# Altium PCB USB-IRIS-W1.PcbDoc (part 3 of 3)
Units mm, origin at the board's own origin, x right, y up, seen from the top; angles counter-clockwise.
Board outline 87.91 x 18 mm, 4 copper layers (Top Layer, Layer 2, Layer 3, Bottom Layer), stack 2.472 mm thick; 87 components, 85 nets, 417 pads, 400 vias.
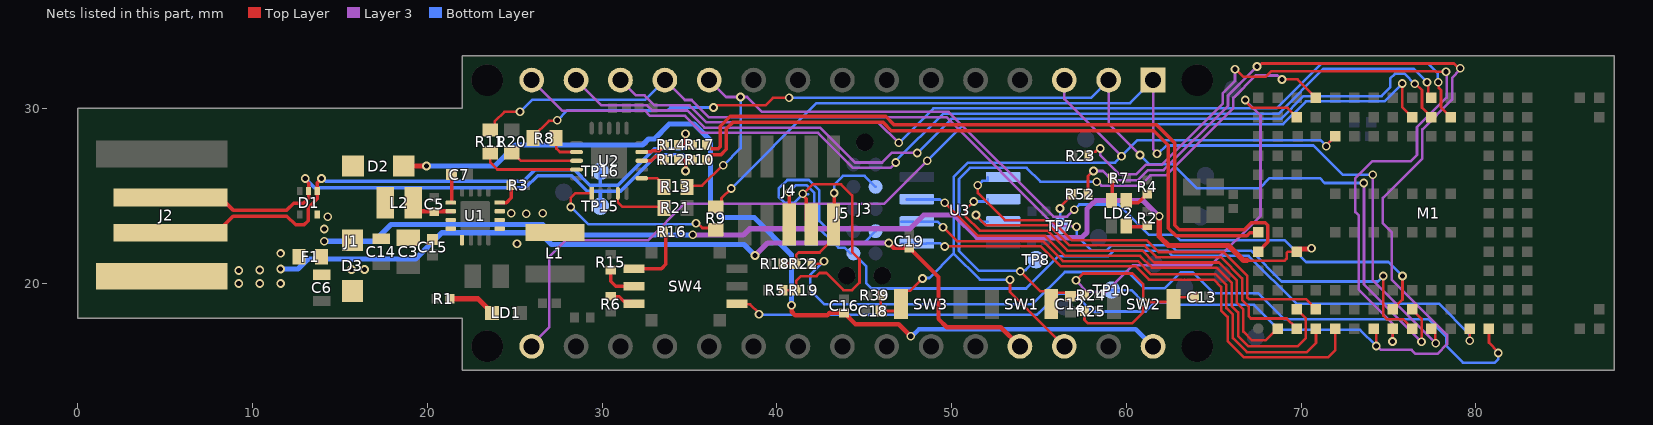
[diagram p4: the nets of this part, all layers, seen from the top]

## Via types
v1: diameter 0.5, hole 0.3, Top Layer to Bottom Layer, tented both sides, 234 vias
v2: diameter 0.5/0.5/0.5/0.5 (per signal layer), hole 0.3, Top Layer to Bottom Layer, tented both sides, 166 vias

## Nets (pads, with @x,y where several pads share a name; then routed paths per layer and width w, separated by ;. In a path a pad name is that pad's centre, name@x,y a point inside that pad or via, vN(x,y) a via of type N, cw(c..) or ccw(c..) an arc to the next point about the centre after c; other vN are vias at no path point) (continued)
JTAG-TDO: J3.6 J4.6 M1.A12 | length 49
  Top Layer w0.15: M1.A12@79.65,17.4 79.654,17.396 v1(79.654,16.701)
  Top Layer w0.2: J4.6@40.7,23.35 v1(40.7,25.2)
  Bottom Layer w0.15: v1(40.7,25.2) 41.1,25.6 41.7,25.6 42.129,25.171 42.129,23.42 43.524,22.025 43.879,22.025 44.204,21.7 J3.6@44.38,21.7 45.118,20.962 45.118,19.982 45.409,19.691 54.265,19.691 56.118,21.544 58.967,21.544 59.278,21.856 62.345,21.856 62.646,21.555 66.996,21.555 69.729,18.821 77.879,18.821 79.641,17.059 79.641,16.714 v1(79.654,16.701)
JTAG-TMS: M1.A14 R22.1 | length 48.7
  Top Layer w0.15: R22.1@42,20.9 42,20.95 R22.1@42.075,21.025 ; R22.1@42,21.1 42.455,21.1 42.605,21.25 v2(42.7,21.25) ; M1.A14@80.75,17.4 80.75,16.594 81.28,16.064 v1(81.28,16.002)
  Bottom Layer w0.15: v2(42.7,21.25) 41.9,20.45 41.9,19.599 42.708,18.791 54.638,18.791 56.482,20.635 60.093,20.635 61.028,19.7 62.187,19.7 63.115,20.629 63.786,20.629 64.988,19.426 67.536,19.426 69.041,17.921 77.33,17.921 78.3,16.951 78.3,16.417 79.266,15.451 81.084,15.451 81.272,15.638 81.272,15.994 v1(81.28,16.002)
NetJ1_2: J1.2 M1.E3 | length 60.5
  Top Layer w0.15: 66.9,21.3 66.925,21.275 69.043,21.275 69.175,21.407 69.175,21.712 69.263,21.8 M1.E3@69.75,21.8
  Top Layer w0.3: v1(61.882,23.831) 61.882,22.674 62.402,22.155 65.845,22.155 66.7,21.3 66.9,21.3 ; M1.E3@69.75,21.8 69.9,21.95 70.496,21.95 70.546,22 v1(70.6,22)
  Layer 3 w0.3: v2(35.179,22.765) 35.185,22.758 38.083,22.758 38.429,23.104 47.604,23.104 48.4,23.9 50.166,23.9 51.466,22.6 57.45,22.6 57.75,22.9 57.75,24.25 58.225,24.725 60.955,24.725 61.849,23.831 v1(61.882,23.831)
  Bottom Layer w0.3: J1.2@16.002,22.4 16.975,22.4 17.925,23.35 26.6,23.35 27.192,22.758 35.173,22.758 v2(35.179,22.765)
NetLD1_1: LD1.1 R1.1 | length 2.7
  Top Layer w0.3: R1.1@21.3,19.1 22.9,19.1 23.45,18.55 LD1.1@23.7,18.3
NetLD2_1: LD2.1 R7.1 | length 1.3
  Top Layer w0.2: LD2.1@59.15,24.725 59.2,24.775 R7.1@59.2,26
NetLD2_2: LD2.2 R4.1 | length 1.5
  Top Layer w0.2: LD2.2@60,24.725 60.125,24.6 60.675,24.6 61.015,24.94 61.04,24.94 R4.1@61.2,25.1
NetLD2_3: LD2.3 R2.1 | length 1.2
  Top Layer w0.2: LD2.3@60,23.225 61.125,23.225 R2.1@61.2,23.3
NetR6_1: R6.1 SW4.6 | length 1.5
  Top Layer w0.2: R6.1@30.5,19.25 30.533,19.217 30.983,19.217 31.232,18.968 31.676,18.968 SW4.6@31.826,18.818
NetR8_1: R8.1 U2.17 | length 1.8
  Top Layer w0.15: R8.1@27.35,28.3 27.382,28.268 27.382,27.7 27.582,27.5 U2.17@28.534,27.5
NetR9_1: R9.1 U2.1 | length 10.8
  Top Layer w0.15: v2(28.202,24.349) 28.202,24.875 28.473,25.146 29.388,25.146 U2.1@29.4,25.135 ; v2(35.366,23.424) 35.461,23.424 35.735,23.15 R9.1@36.6,23.15
  Bottom Layer w0.15: v2(28.202,24.349) 28.226,24.349 29.2,23.375 35.318,23.375 v2(35.366,23.424)
NetR11_1: R11.1 U2.19 | length 5.7
  Top Layer w0.15: R11.1@23.6,27.45 23.6,26.9 24,26.5 27.932,26.5 U2.19@28.534,26.5
NetR13_1: R13.1 U2.6 | length 1.5
  Top Layer w0.15: U2.6@32.265,26 33.125,26 33.55,25.575 R13.1@33.55,25.5
NetR15_1: R15.1 SW4.5 | length 2.1
  Top Layer w0.2: R15.1@30.5,20.75 30.5,20.1 30.782,19.818 SW4.5@31.826,19.818
NetR16_1: R16.1 SW4.4 | length 3.9
  Top Layer w0.2: SW4.4@31.826,20.818 33.393,20.818 33.65,21.075 33.65,22.825 R16.1@33.525,22.95
NetR20_1: R20.1 U2.18 | length 3.9
  Top Layer w0.15: R20.1@24.834,27.45 24.909,27.45 25.359,27 U2.18@28.534,27
NetR21_1: R21.1 U2.4 | length 3.3
  Top Layer w0.15: U2.4@30.9,25.135 30.9,24.625 31.15,24.375 33.42,24.375 R21.1@33.513,24.282
P_IN: C3.1 C5.1 C15.1 L2.2 U1.10 U1.11 U1.12 U1.13 | length 2.4
  Top Layer w0.254: L2.2@19.2,24.6 19.2,24.473 19.573,24.1 C5.1@20.4,24.1 20.41,24.11 U1.10@21.336,24.11
PG: R3.1 U1.4 | length 1.5
  Top Layer w0.2: U1.4@24.136,24.61 24.146,24.6 24.525,24.6 24.8,24.875 R3.1@24.8,25.6
POW_IN: C14.1 D2.C D3.C L2.1
QSPI_RCE: M1.A5 U3.1 | length 30.6
  Top Layer w0.15: v1(49.6,22.1) 55.1,22.1 56.244,20.956 60.54,20.956 61.295,20.2 65,20.2 65.425,19.775 65.425,18.434 65.798,18.061 65.798,16.677 66.725,15.75 71.55,15.75 71.95,16.15 M1.A5@71.95,17.4
  Bottom Layer w0.15: U3.1@47.127,22.25 47.13,22.254 48.554,22.254 48.58,22.28 49.325,22.28 49.505,22.1 v1(49.6,22.1)
QSPI_RCLK: M1.A2 U3.6 | length 24.5
  Top Layer w0.15: v1(51.267,24.667) 50.8,24.2 50.8,23.824 51.624,23 55.473,23 56.617,21.856 60.913,21.856 61.588,21.18 65.293,21.18 66.325,20.148 66.325,18.874 66.698,18.501 66.698,17.227 67.2,16.725 67.975,16.725 M1.A2@68.65,17.4
  Bottom Layer w0.15: v1(51.267,24.667) 52.035,24.667 52.067,24.699 U3.6@52.067,24.79
QSPI_RD0: M1.B4 U3.5 | length 24.1
  Top Layer w0.15: v1(51.5,25.6) 51.5,25.152 53.052,23.6 55.721,23.6 56.866,22.456 61.161,22.456 61.837,21.78 65.552,21.78 66.925,20.407 66.925,19.163 67.013,19.075 70.275,19.075 M1.B4@70.85,18.5
  Bottom Layer w0.15: v1(51.5,25.6) 51.513,25.6 51.763,25.85 52.035,25.85 52.067,25.882 U3.5@52.067,26.06
QSPI_RD1: M1.A4 U3.2 | length 29.4
  Top Layer w0.15: v1(49.5,23.2) 50.3,22.4 55.224,22.4 56.369,21.256 60.664,21.256 61.42,20.5 65.124,20.5 65.725,19.899 65.725,18.563 66.098,18.19 66.098,16.853 66.901,16.05 70.325,16.05 70.85,16.575 M1.A4@70.85,17.4
  Bottom Layer w0.15: U3.2@47.127,23.52 47.14,23.508 48.508,23.508 48.515,23.515 49.185,23.515 v1(49.5,23.2)
QSPI_RD2: M1.B3 U3.3 | length 30
  Top Layer w0.15: v1(49.6,24.6) 51.5,22.7 55.349,22.7 56.493,21.556 60.788,21.556 61.464,20.88 65.169,20.88 66.025,20.024 66.025,18.687 66.398,18.314 66.398,16.977 67,16.375 69.8,16.375 70.275,16.85 70.275,17.975 M1.B3@69.75,18.5
  Bottom Layer w0.15: U3.3@47.434,24.783 49.322,24.783 49.505,24.6 v1(49.6,24.6)
QSPI_RD3: M1.A3 U3.7 | length 22.9
  Top Layer w0.15: v1(51.4,23.9) 51.4,23.878 51.978,23.3 55.597,23.3 56.741,22.156 61.037,22.156 61.713,21.48 65.417,21.48 66.625,20.272 66.625,19.039 66.998,18.666 66.998,18.102 67.125,17.975 69.175,17.975 M1.A3@69.675,17.475
  Bottom Layer w0.15: v1(51.4,23.9) 51.4,23.843 51.735,23.508 52.035,23.508 52.048,23.52 U3.7@52.067,23.52
RESET: C18.1 J5.3 J5.28 M1.L5 R39.1 SW3.1 | length 48.9
  Top Layer w0.15: R39.1@46,19.3 45.95,19.25 C18.1@45.95,18.4 46.775,18.4 47.1,18.725 SW3.1@47.1,18.8 47.1,19.226 47.425,19.551 47.618,19.551 v1(48.336,20.269) ; v1(53.34,20.193) 53.34,19.487 J5.28@56.447,16.38 ; v1(71.444,27.829) 71.444,27.894 M1.L5@71.95,28.4
  Layer 3 w0.15: J5.3@56.447,31.62 56.447,30.531 v1(59.718,27.261)
  Bottom Layer w0.15: v1(48.336,20.269) 48.356,20.289 48.721,20.289 50.119,21.687 ; v1(53.34,20.193) 51.613,20.193 50.119,21.687 ; v1(71.444,27.829) 71.098,28.175 60.632,28.175 v1(59.718,27.261) 59.347,26.89 51.29,26.89 50.926,26.89 50.119,26.083 50.119,21.687
RF_CTRL2: M1.A7 R52.2 SW4.1 | length 89.6
  Top Layer w0.15: SW4.1@37.726,18.818 37.757,18.787 38.463,18.787 38.976,18.274 v1(38.976,18.222) ; R52.2@57.803,25.095 57.803,26.124 58.094,26.415 v1(58.115,26.415) ; v1(67.479,32.394) 67.557,32.394 67.732,32.569 78.736,32.569 79.005,32.3 v1(79.1,32.3) ; M1.A7@74.15,17.4 74.3,17.25 v1(74.3,16.4)
  Layer 3 w0.15: v1(58.115,26.415) 58.65,26.415 59.187,25.878 60.642,25.878 61.226,26.462 62.131,26.462 65.816,30.147 65.816,30.731 v1(67.479,32.394) ; v1(74.3,16.4) 74.343,16.4 74.563,16.18 76.327,16.18 76.556,15.951 77.8,15.951 78.359,16.51 78.359,17.043 75.184,20.218 75.184,22.911 74.676,23.419 74.676,24.867 76.932,27.123 76.932,28.799 78.638,30.505 78.638,31.75 79.1,32.212 v1(79.1,32.3)
  Bottom Layer w0.15: v1(38.976,18.222) 39.007,18.191 54.887,18.191 54.995,18.3 55.011,18.3 56.096,19.385 57.018,19.385 58.028,18.375 61.1,18.375 61.6,18.875 62.415,18.875 62.535,18.755 67.3,18.755 68.734,17.321 73.379,17.321 v1(74.3,16.4)
RF_CTRL3: M1.A8 R23.2 | length 45.5
  Top Layer w0.15: R23.2@57.85,27.3 57.85,27.35 58.025,27.525 58.237,27.525 58.412,27.7 v1(58.5,27.7) ; v1(66.218,32.233) 66.262,32.233 66.694,31.801 67.97,31.801 68.301,32.131 77.685,32.131 77.722,32.094 v1(78.294,32.094) ; v1(75.235,16.662) 75.235,17.385 M1.A8@75.25,17.4
  Layer 3 w0.15: v1(58.5,27.7) 58.5,27.323 59.598,26.225 60.564,26.225 61.101,26.762 62.007,26.762 65.516,30.271 65.516,30.871 66.218,31.572 v1(66.218,32.233) ; v1(75.235,16.662) 75.235,17.681 73.3,19.615 73.3,23.872 73.108,24.064 73.108,26.008 74.076,26.976 76.276,26.976 76.632,27.332 76.632,28.923 78.326,30.617 78.326,32.062 v1(78.294,32.094)
SPI-CLK: J5.16 M1.M9 | length 60.6
  Top Layer w0.15: v1(75.794,31.42) 75.794,30.056 M1.M9@76.35,29.5
  Layer 3 w0.15: J5.16@25.967,16.38 25.967,16.467 26.975,17.475 26.975,21.525 27.9,22.45 32.625,22.45 34.725,24.55 46.15,24.55 v1(48.6,27)
  Bottom Layer w0.15: v1(48.6,27) 50.7,29.1 68.973,29.1 70.273,30.4 74.774,30.4 v1(75.794,31.42)
SPI-CS: J5.13 M1.M11 | length 53.2
  Top Layer w0.15: v1(77.851,31.496) 77.884,31.463 77.884,31.158 78.003,31.039 78.003,30.047 M1.M11@78.55,29.5
  Layer 3 w0.15: J5.13@31.047,31.62 31.927,30.74 32.433,30.74 32.999,30.175 34.999,30.175 35.974,29.2 45.8,29.2 v1(46.975,28.025)
  Bottom Layer w0.15: v1(46.975,28.025) 48.95,30 68.6,30 71.169,32.569 77.247,32.569 77.819,31.997 77.819,31.528 v1(77.851,31.496)
SPI-MISO: J5.15 M1.N10 | length 57
  Top Layer w0.15: v1(77.2,31.5) 77.267,31.433 77.267,30.783 M1.N10@77.45,30.6
  Layer 3 w0.15: J5.15@25.967,31.62 27.715,29.873 32.452,29.873 32.75,29.575 34.75,29.575 35.725,28.6 42.35,28.6 44.35,26.6 46.5,26.6 v1(46.8,26.9)
  Bottom Layer w0.15: v1(46.8,26.9) 46.8,26.975 49.525,29.7 68.724,29.7 71.293,32.269 76.431,32.269 v1(77.2,31.5)
SPI-MOSI: J5.14 M1.M10 | length 54.9
  Top Layer w0.15: v1(76.5,31.4) 76.554,31.4 76.916,31.038 76.916,30.034 M1.M10@77.45,29.5
  Layer 3 w0.15: J5.14@28.507,31.62 29.955,30.173 32.576,30.173 32.874,29.875 34.874,29.875 35.849,28.9 42.474,28.9 44.474,26.9 46.025,26.9 46.585,27.46 48.015,27.46 v1(48.033,27.442)
  Bottom Layer w0.15: v1(48.033,27.442) 49.99,29.4 68.849,29.4 70.149,30.7 74.6,30.7 75.1,31.2 75.1,31.7 75.369,31.969 75.931,31.969 v1(76.5,31.4)
SW: L1.1 U1.1 U1.2 U1.3
  other v2: 25.125,22.25 25.661,23.973 24.8,24 26.6,24
SW_BT1: C12.1 M1.N4 R24.1 SW1.1 TP8.1 | length 38.9
  Top Layer w0.15: v1(53.93,20.67) 55.066,19.534 55.375,19.534 55.7,19.209 SW1.1@55.7,19.125 ; SW1.1@55.7,18.8 SW1.1@55.7,19.125 ; C12.1@56.875,19.375 C12.1@56.95,19.3 ; C12.1@56.9,19.4 C12.1@56.95,19.35 ; R24.1@57.6,19.3 C12.1@56.95,19.3 ; v1(68.91,31.656) 69.794,31.656 M1.N4@70.85,30.6 ; SW1.1@55.7,19.125 56.025,19.45 56.8,19.45 C12.1@56.95,19.3
  Layer 3 w0.15: v1(58.306,25.794) 58.353,25.794 58.569,25.578 60.782,25.578 61.366,26.162 62.255,26.162 66.116,30.023 66.116,30.59 67.403,31.877 68.647,31.877 68.868,31.656 v1(68.91,31.656)
  Bottom Layer w0.15: TP8.1@54.84,21.34 54.237,20.737 53.997,20.737 v1(53.93,20.67) 53.9,20.7 51.563,20.7 50.419,21.844 50.419,25.959 51.05,26.59 54.285,26.59 55.075,25.8 58.3,25.8 v1(58.306,25.794)
SW_BT2: C13.1 M1.M3 R25.1 SW2.1 TP10.1 | length 38.3
  Top Layer w0.15: v1(57.12,20.16) 57.506,20.547 60.353,20.547 60.959,19.941 v1(60.959,18.92) ; R25.1@57.6,18.4 57.6,17.9 57.8,17.7 60.325,17.7 60.954,18.329 60.954,18.914 v1(60.959,18.92) ; C13.1@63.85,19.2 63.025,19.2 62.7,18.875 SW2.1@62.7,18.8 62.58,18.92 v1(60.959,18.92) ; v1(66.8,30.475) 66.8,30.432 67.2,30.032 69.218,30.032 M1.M3@69.75,29.5
  Layer 3 w0.15: v1(57.12,20.16) 57.12,20.136 57.755,19.5 58.845,19.5 60.37,21.025 64.85,21.025 67.675,23.85 67.675,29.6 v1(66.8,30.475)
  Bottom Layer w0.15: TP10.1@59.15,19.6 60.279,19.6 v1(60.959,18.92)
TCK/SWCLK: J3.4 J4.4 R5.2 R19.2 | length 27.2
  Top Layer w0.15: R5.2@40.353,19.603 R5.2@40.35,19.6 R19.2@41.1,19.6 41.1,20.125 41.375,20.4 42.275,20.4 42.45,20.575 42.829,20.575 43.804,19.6 44.3,19.6 44.724,20.024 44.724,21.356 44.308,21.772 44.308,25.017 43.675,25.65 42.05,25.65 v1@41.5,25.1
  Top Layer w0.2: v1(41.485,25.115) 41.5,25.1 41.5,25.019 41.69,24.829 41.69,23.63 J4.4@41.97,23.35
  Bottom Layer w0.15: v1(41.485,25.115) 41.485,25.085 41,24.6 40.424,24.6 40.1,24.924 40.1,25.4 40.6,25.9 41.824,25.9 42.429,25.295 42.429,23.545 43.649,22.325 45.005,22.325 J3.4@45.65,22.97 ; v1@41.5,25.1 41.521,25.079 41.797,25.079
TMS/SWDIO: J3.2 J4.2 R18.2 R22.2 | length 9.7
  Top Layer w0.15: R18.2@40.35,21.1 R22.2@41.1,21.1 41.1,21.6 41.25,21.75 42.45,21.75 42.925,22.225 42.935,22.225 43.24,22.53 J4.2@43.24,23.35
  Top Layer w0.2: J4.2@43.24,23.35 43.275,23.385 v1(43.275,25.15)
  Bottom Layer w0.15: v1(43.275,25.15) 43.275,25.625 43.785,26.135 45.025,26.135 J3.2@45.65,25.51
TP7: R52.1 TP7.1 | length 2.1
  Top Layer w0.15: v1(56.2,24.275) 56.2,24.35 56.72,24.87 56.728,24.87 56.903,25.045 R52.1@56.903,25.095
  Bottom Layer w0.15: v1(56.2,24.275) 56.205,24.27 56.205,23.275 TP7.1@56.21,23.27
TR: C7.1 U1.9 | length 1.6
  Top Layer w0.2: U1.9@21.336,24.61 21.366,24.61 21.386,24.63 C7.1@21.386,26.21
UART3-CTS: J5.12 M1.A9 R11.2 | length 62.1
  Top Layer w0.15: R11.2@23.6,28.75 23.862,29.012 23.862,29.262 24.4,29.8 v2(25.3,29.8) ; v1(74.7,20.4) 74.7,18.132 74.899,17.932 75.818,17.932 M1.A9@76.35,17.4
  Layer 3 w0.15: J5.12@33.587,31.62 34.733,30.475 35.123,30.475 36.098,29.5 49.7,29.5 55.95,23.25 57.13,23.25 v1(57.152,23.228)
  Bottom Layer w0.15: v2(25.3,29.8) 26,30.5 32.467,30.5 J5.12@33.587,31.62 ; v1(57.152,23.228) 57.152,22.723 58.031,21.844 58.842,21.844 59.154,22.156 62.525,22.156 62.826,21.855 67.12,21.855 68.884,20.091 74.391,20.091 v1(74.7,20.4)
UART3-RTS: J5.11 M1.B8 R13.2 | length 53.9
  Top Layer w0.15: R13.2@34.85,25.5 34.925,25.575 35.725,25.575 36.887,26.737 v1(36.933,26.737) ; M1.B8@75.25,18.5 75.8,19.05 v1(75.8,20.4)
  Layer 3 w0.15: J5.11@36.127,31.62 37.097,30.65 38.299,30.65 39.149,29.8 49.824,29.8 55.824,23.8 56.613,23.8 v1(57.017,24.204)
  Bottom Layer w0.15: v1(36.933,26.737) 37.922,27.726 v1(37.922,30.65) ; v1(57.017,24.204) 57.313,24.5 59.556,24.5 61.3,22.756 62.774,22.756 63.074,22.455 69.036,22.455 70.282,21.209 74.991,21.209 v1(75.8,20.4)
UART3-RXD: J5.2 M1.B9 R8.2 | length 65.9
  Top Layer w0.15: R8.2@26.05,28.3 26.05,28.375 26.962,29.287 27.407,29.287 v2(27.437,29.316) ; v2(36.375,30.05) 36.47,30.05 36.595,30.175 39.345,30.175 39.769,30.6 v2(40.7,30.6) ; M1.B9@76.35,18.5 76.9,17.95 76.9,16.651 v1(76.886,16.637)
  Layer 3 w0.15: J5.2@58.987,31.62 58.987,29.122 60.779,27.33 v1(60.782,27.33) ; v1(73.583,25.725) 73.6,25.708 73.6,19.923 v1(76.886,16.637)
  Bottom Layer w0.15: v2(27.437,29.316) 27.996,29.875 33.725,29.875 33.9,30.05 v2(36.375,30.05) ; v2(40.7,30.6) 57.967,30.6 J5.2@58.987,31.62 ; v1(60.782,27.33) 60.782,27.327 61.313,26.797 62.68,26.797 64.052,25.425 67.625,25.425 68.2,26 71.075,26 71.35,25.725 v1(73.583,25.725)
UART3-TXD: J5.1 M1.A10 R9.2 | length 57.7
  Top Layer w0.15: R9.2@36.7,24.35 36.832,24.482 36.832,24.861 v1(37.389,25.417) ; M1.A10@77.45,17.4 77.675,17.175 77.675,16.584 v1(77.699,16.561)
  Layer 3 w0.15: J5.1@61.527,31.62 61.527,27.669 61.747,27.45 v1(61.747,27.407) ; v1(74.1,26.2) 74.1,20.159 v1(77.699,16.561)
  Bottom Layer w0.15: v1(37.389,25.417) 42.272,30.3 60.207,30.3 J5.1@61.527,31.62 ; v1(61.747,27.407) 61.817,27.407 62.285,27.875 70.7,27.875 72.375,26.2 v1(74.1,26.2)
USB_I_N: R14.2 U2.9 | length 1.5
  Top Layer w0.2: U2.9@32.265,27.5 32.274,27.508 32.816,27.508 32.893,27.585 33.265,27.585 33.575,27.895 R14.2@33.575,27.91
USB_I_P: R12.2 U2.8 | length 1.5
  Top Layer w0.2: U2.8@32.265,27 32.803,27 33.031,27.229 33.415,27.229 33.575,27.069 R12.2@33.575,27.06
USB_IOD_N: M1.E1 R17.1 | length 41.1
  Top Layer w0.2: R17.1@35.975,27.91 35.975,27.895 36.135,27.735 36.215,27.735 36.252,27.698 36.637,27.698 36.754,27.815 36.754,28.969 37.325,29.54 46.228,29.54 46.693,29.075 61.705,29.075 62.763,28.016 62.763,23.317 63.026,23.055 66.751,23.055 67.146,23.45 67.954,23.45 68.1,23.304 68.1,22.35 M1.E1@67.55,21.8
USB_IOD_P: M1.F1 R10.2 | length 38.7
  Top Layer w0.2: R10.2@35.975,27.06 35.975,27.075 36.23,27.33 36.779,27.33 37.107,27.658 37.107,28.827 37.47,29.19 46.083,29.19 46.548,28.725 61.56,28.725 62.4,27.885 62.4,23.147 62.842,22.705 66.9,22.705 67.067,22.872 67.522,22.872 M1.F1@67.55,22.9
USB_N: D1.1 J2.2 R14.1 R17.2 TP16.1 | length 36.7
  Top Layer w0.2: J2.2@5.3,22.998 8.043,22.998 8.876,23.831 11.956,23.831 12.458,23.329 12.939,23.329 13.181,23.571 13.181,24.308 13.7,24.827 13.7,25.728 13.943,25.971 v2(13.943,25.984) ; R14.1@34.375,27.91 34.775,27.91 ; v2(34.775,28.55) 34.775,27.91 ; R17.2@35.175,27.91 34.775,27.91
  Bottom Layer w0.2: v2(13.943,25.984) 14.024,25.984 14.174,25.834 25.497,25.834 26.162,26.5 28.395,26.5 29.295,25.6 29.911,25.6 ; TP16.1@29.9,26.4 29.9,25.611 29.911,25.6 ; v2(34.775,28.55) 34.775,27.804 34.658,27.687 32.994,27.687 30.908,25.6 29.911,25.6
USB_P: D1.2 J2.3 R10.1 R12.1 TP15.1 | length 36.4
  Top Layer w0.2: J2.3@5.3,25.014 8.043,25.014 8.876,24.181 11.962,24.181 12.343,24.562 12.909,24.562 13.2,24.852 13.2,25.706 13.003,25.903 v2(13.003,25.984) ; R12.1@34.375,27.06 34.773,27.06 ; v2(34.773,26.416) 34.773,27.06 ; R10.1@35.175,27.06 34.773,27.06
  Bottom Layer w0.2: v2(13.003,25.984) 13.538,25.449 25.606,25.449 26.307,26.15 28.25,26.15 29.15,25.25 29.923,25.25 ; TP15.1@29.9,24.4 29.9,25.227 29.923,25.25 ; v2(34.773,26.416) 34.773,27.192 34.633,27.331 33.134,27.331 31.053,25.25 29.923,25.25
VBUS: C6.1 D1.5 D3.A F1.2 J1.1 | length 1.2
  Bottom Layer w0.3: v2(14.1,22.4) J1.1@15.326,22.4
  other v2: 15.65,20.775 16.4,20.775 14.1,23.1 14.3,23.8
VBUS_OUT: C19.1 F1.1 J2.1 J5.27 | length 47.9
  Top Layer w0.25: v1(46.4,22.3) 46.675,22.025 47.552,22.025 C19.1@47.574,22.003 ; C19.1@47.586,22.014 49.25,20.35 49.25,17.95 49.725,17.475 52.813,17.475 J5.27@53.907,16.38
  Layer 3 w0.3: v1(38.741,21.584) 39.457,22.3 v1(46.4,22.3)
  Bottom Layer w0.3: v2(11.6,20.8) 12.6,20.8 13.175,21.375 19.325,21.375 20.835,22.885 26.429,22.885 27.099,22.215 35.178,22.215 38.11,22.215 v1(38.741,21.584)
  other v2: 9.2,19.975 10.4,19.975 11.6,19.975 9.2,20.725 10.4,20.75 11.6,21.7
VIN: C16.1 D2.A J5.30 | length 53.7
  Top Layer w0.254: v2(40.833,18.725) 40.85,18.708 40.85,18.357 41.057,18.15 42.879,18.15 43.024,18.294 C16.1@43.84,18.294 43.855,18.294 44.5,17.65 46.968,17.65 v1(47.657,16.961)
  Top Layer w0.3: D2.A@18.65,26.7 v2(19.95,26.7)
  Bottom Layer w0.254: v1(47.657,16.961) 47.724,16.961 48.127,17.364 60.543,17.364 J5.30@61.527,16.38
  Bottom Layer w0.3: v2(19.95,26.7) 23.85,26.7 25.05,27.9 32.3,27.9 32.65,28.25 32.992,28.25 33.842,29.1 35.25,29.1 36.2,28.15 36.2,24.45 36.9,23.75 38.7,23.75 40.833,21.617 v2(40.833,18.725)
pads on no net: D1.4 J3.5 J3.7 J3.9 J3.A J3.B J3.C J4.7 M1.A1 M1.A16 M1.B1 M1.B2 M1.B6 M1.B7 M1.C1 M1.C2 M1.C4 M1.C5 M1.C6 M1.C7 M1.C8 M1.C9 M1.C10 M1.C11 M1.C12 M1.C14 M1.C16 M1.D1 M1.D2 M1.F2 M1.F3 M1.J2 M1.J3 M1.K1 M1.L4 M1.L9 M1.L10 M1.L11 M1.L12 M1.L14 M1.L16 M1.M2 M1.M4 M1.N1 M1.N2 M1.N9 M1.N11 M1.N16 TP5.1 TP9.1 TP13.1 U2.2 U2.5 U2.7 U2.14 U2.15 U2.16
copper on no net: | length 0
  Top Layer w0.15: 68.65,19.6 68.659,19.609

## Polygon pours and split planes (outlines as drawn)
GND on Top Layer "Top Layer-GND 2" (solid, remove dead copper, pour order 140): 6.725,26.627 8.811,26.627 8.811,18 22,18 22,17.9 22,15 87.909,15 87.909,33 22,33 22,29.9 8.811,29.9 8.811,28.151 6.716,28.151
+3V3 on Top Layer "TOP_LAYER_+3V3_P109" (solid, pour order 109): 70.3,25.7 72.441,27.841 72.441,28.829 72.619,29.007 73.254,29.007 73.35,28.91 73.35,26.69 71.36,24.7 63.35,24.7 63.2,24.85 63.2,26.825 63.475,27.1 65.9,27.1 67.3,25.7
+3V3 on Top Layer "3V3_TOP_02" (solid, pour order 8): 27.693,18.407 28.773,18.406 28.773,18.376 28.873,18.276 28.873,17.227 28.9,17.2 29.217,16.883 29.217,15 27.8,15 27.8,16.523 27.023,17.3 25.2,17.3 24.5,18 24.5,18.7 23.35,19.85 23.35,21.1 23.125,21.325 22.425,21.325 22.25,21.5 22.25,22.75 22.35,22.85 22.625,22.85 22.725,22.75 22.725,22.05 23.125,21.65 29.85,21.65 29.975,21.525 29.975,19.375 29.875,19.275 27.025,19.275 26.85,19.1 26.85,18.55 26.993,18.407
+3V3 on Top Layer "TOP_LAYER_+3V3_P107" (solid, pour order 107): 31.75,28.448 31.877,28.321 31.877,27.915 31.979,27.813 32.944,27.813 33.553,28.423 33.553,29.347 33.5,29.4 32.474,29.4 32.41,29.464 32.41,30.607 32.283,30.734 31.14,30.734 31.064,30.658 31.064,29.667 30.734,29.337 30.734,28.473 30.759,28.448
VBUS_OUT on Top Layer "NONET_L-01_P-001" (solid, pour order 129): 12.386,19.8 12.975,19.8 13.1,19.925 13.1,20.514 13.1,22.3 12.9,22.5 11.75,22.5 10.4,21.15 6.998,21.15 6.998,19.625 12.211,19.625
VBUS on Top Layer "NONET_L-01_P-001" (solid, pour order 130): 14.051,19.941 14.066,19.925 14.625,19.925 14.697,19.853 14.697,19.278 15.275,18.7 16.7,18.7 16.7,21.1 16.6,21.2 14.883,21.2 14.6,21.483 14.6,24 14.3,24.3 13.5,24.3 13.5,20.09 14.035,20.09 14.035,19.972
P_IN on Top Layer "NONET_L-01_P-001" (solid, pour order 135): 18.491,25.679 18.491,23.441 18.075,23.025 18.075,21.925 18.208,21.792 18.892,21.792 19.2,22.1 20.604,22.1 20.912,21.792 22.106,21.787 22.106,22.784 21.896,22.994 21.896,23.604 21.7,23.8 20.094,23.8 19.939,23.955 19.939,25.73 19.835,25.834 18.646,25.834
POW_IN on Top Layer "NONET_L-01_P-001" (solid, pour order 134): 17.128,21.975 17.825,21.975 17.9,22.05 17.9,23.15 18.3,23.55 18.3,25.741 18.108,25.933 17.767,25.933 17.5,26.2 17.5,27.8 17.3,28 14.7,28 14.5,27.8 14.5,26.2 15.251,25.449 15.951,25.449 16.2,25.2 16.2,23.7 15.9,23.4 15,23.4 14.9,23.3 14.9,21.7 15.103,21.497 16.65,21.497
SW on Top Layer "NONET_L-01_P-001" (solid, pour order 132): 23.875,24.375 23.7,24.2 23.7,22.98 24.055,22.625 24.35,22.625 25.125,21.85 29.4,21.85 29.6,22.05 29.6,23.65 28.875,24.375
VBUS_OUT on Top Layer "Top Layer-SPI-F_IO4" (solid, pour order 110): 53.186,16.4 53.186,15.02 54.6,15.02 54.6,16.4
GND on Top Layer "TOP_LAYER_GND_P108" (solid, pour order 108): 30.556,29.413 30.86,29.717 30.86,30.608 30.734,30.734 29.464,30.734 29.439,30.709 29.439,30.124 28.423,30.124 28.219,29.921 28.219,28.499 28.423,28.296 28.88,28.296 29.108,28.067 29.108,25.883 29.261,25.73 30.074,25.73 30.201,25.603 30.201,24.714 30.607,24.714 30.607,25.603 30.734,25.73 31.572,25.73 31.674,25.832 31.674,28.143 31.572,28.245 30.734,28.245 30.556,28.423
GPIO61 on Top Layer "Top Layer-SPI-F_IO4" (solid, pour order 51): 50.66,16.38 50.66,15 52.074,15 52.074,16.38
GPIO48 on Top Layer "Top Layer-SPI-F_IO5" (solid, pour order 49): 40.5,16.38 40.5,15 41.914,15 41.914,16.38
I2C-SDA on Top Layer "Top Layer-I2C-SDA_NANO" (solid, pour order 52): 43.04,16.38 43.04,15 44.454,15 44.454,16.38
GPIO46 on Top Layer "Top Layer-SPI-F_IO7" (solid, pour order 53): 35.42,16.38 35.42,15 36.834,15 36.834,16.38
GPIO45 on Top Layer "Top Layer-GPIO4" (solid, pour order 54): 32.88,16.38 32.88,15 34.294,15 34.294,16.38
I2C-SCL on Top Layer "Top Layer-I2C-SCL_NANO" (solid, pour order 57): 45.58,16.38 45.58,15 46.994,15 46.994,16.38
GPIO47 on Top Layer "Top Layer-GPIO9" (solid, pour order 59): 37.96,16.38 37.96,15 39.374,15 39.374,16.38
+3V3 on Top Layer "Top Layer-No Net 1" (solid, pour order 61): 27.8,16.38 27.8,15 29.214,15 29.214,16.38
GPIO49 on Top Layer "Top Layer-SPI-F_IO6" (solid, pour order 77): 48.12,16.38 48.12,15 49.534,15 49.534,16.38
GPIO11/UART3-DTR on Top Layer "Top Layer-SPI-F_CS0_NANO" (solid, pour order 78): 41.914,31.62 41.914,33 40.5,33 40.5,31.62
UART3-RXD on Top Layer "Top Layer-UART0-RXD_NANO_IN" (solid, pour order 79): 59.694,31.62 59.694,33 58.28,33 58.28,31.62
GPIO56/D3 on Top Layer "Top Layer-GPIO21_NANO" (solid, pour order 80): 49.534,31.62 49.534,33 48.12,33 48.12,31.62
GPIO12/UART3-DSR on Top Layer "Top Layer-UART0-DSR_NANO" (solid, pour order 83): 39.374,31.62 39.374,33 37.96,33 37.96,31.62
GPIO57/D4 on Top Layer "Top Layer-SPI-F_HD_NANO" (solid, pour order 86): 46.994,31.62 46.994,33 45.58,33 45.58,31.62
UART3-TXD on Top Layer "Top Layer-UART0-TXD_NANO_IN" (solid, pour order 89): 62.234,31.62 62.234,33 60.82,33 60.82,31.62
GPIO58/D5 on Top Layer "Top Layer-SPI-F_DQS_NANO" (solid, pour order 90): 44.454,31.62 44.454,33 43.04,33 43.04,31.62
GPIO62/D2 on Top Layer "Top Layer-SPI-F_WP_NANO" (solid, pour order 96): 52.074,31.62 52.074,33 50.66,33 50.66,31.62
UART3-RTS on Top Layer "Top Layer-UART0-DTR_NANO" (solid, pour order 87): 36.834,31.62 36.834,33 35.42,33 35.42,31.62
SPI-CS on Top Layer "Top Layer-UART0-RTS_NANO" (solid, pour order 91): 31.754,31.62 31.754,33 30.34,33 30.34,31.62
GND on Top Layer "Top Layer-GND 1" (solid, pour order 88): 54.614,31.62 54.614,33 53.2,33 53.2,31.62
UART3-CTS on Top Layer "Top Layer-UART0-CTS_NANO" (solid, pour order 85): 34.294,31.62 34.294,33 32.88,33 32.88,31.62
SPI-MISO on Top Layer "Top Layer-SPI-F_Q_NANO" (solid, pour order 84): 26.674,31.62 26.674,33 25.26,33 25.26,31.62
RESET on Top Layer "Top Layer-RESET_N 1" (solid, pour order 82): 57.154,31.62 57.154,33 55.74,33 55.74,31.62
SPI-MOSI on Top Layer "Top Layer-SPI-F_D_NANO" (solid, pour order 81): 29.214,31.62 29.214,33 27.8,33 27.8,31.62
GND on Top Layer "Top Layer-GND" (solid, pour order 60): 58.28,16.38 58.28,15 59.694,15 59.694,16.38
SPI-CLK on Top Layer "Top Layer-SPI-F_CLK_NANO" (solid, pour order 58): 25.26,16.38 25.26,15 26.674,15 26.674,16.38
RESET on Top Layer "Top Layer-RESET_N" (solid, pour order 56): 55.74,16.38 55.74,15 57.154,15 57.154,16.38
IOREF on Top Layer "Top Layer-IOREF" (solid, pour order 50): 30.341,16.38 30.341,15 31.755,15 31.755,16.38
VIN on Top Layer "Top Layer-VIN" (solid, pour order 48): 60.82,16.38 60.82,15 62.234,15 62.234,16.38
no net on Top plating "NONET_L-01_P-001" (solid): 0,30 0,18 8.6,18 8.6,26.716 8.6,30
GND on Bottom Layer "GND_L2" (solid, remove dead copper, pour order 136): 22.095,29.9 8.825,29.9 8.825,17.9 22,17.9 22,15 22.095,15.095 87.909,15.095 87.909,33 22.095,33
+3V3 on Bottom Layer "BOTTOM_LAYER_+3V3_P124" (solid, pour order 124): 54.05,21.1 54.912,21.962 54.912,25 54.19,25 54.19,23.14 53.95,22.9 51.75,22.9 51.65,22.8 51.65,21.2 51.75,21.1
GPIO47 on Bottom Layer "Bottom Layer-GPIO9" (solid, pour order 34): 37.96,16.38 37.96,15 39.374,15 39.374,16.38
I2C-SCL on Bottom Layer "Bottom Layer-I2C-SCL_NANO" (solid, pour order 35): 45.58,16.38 45.58,15 46.994,15 46.994,16.38
GPIO46 on Bottom Layer "Bottom Layer-SPI-F_IO7" (solid, pour order 36): 35.42,16.38 35.42,15 36.834,15 36.834,16.38
GPIO49 on Bottom Layer "Bottom Layer-SPI-F_IO6" (solid, pour order 39): 48.12,16.38 48.12,15 49.534,15 49.534,16.38
GPIO48 on Bottom Layer "Bottom Layer-SPI-F_IO5" (solid, pour order 40): 40.5,16.38 40.5,15 41.914,15 41.914,16.38
GPIO61 on Bottom Layer "Bottom Layer-SPI-F_IO4" (solid, pour order 42): 50.66,16.38 50.66,15 52.074,15 52.074,16.38
I2C-SDA on Bottom Layer "Bottom Layer-I2C-SDA_NANO" (solid, pour order 44): 43.04,16.38 43.04,15 44.454,15 44.454,16.38
GPIO45 on Bottom Layer "Bottom Layer-GPIO4" (solid, pour order 46): 32.88,16.38 32.88,15 34.294,15 34.294,16.38
UART3-TXD on Bottom Layer "Bottom Layer-UART0-TXD_NANO_IN" (solid, pour order 62): 62.234,31.62 62.234,33 60.82,33 60.82,31.62
GPIO58/D5 on Bottom Layer "Bottom Layer-SPI-F_DQS_NANO" (solid, pour order 64): 44.454,31.62 44.454,33 43.04,33 43.04,31.62
GPIO62/D2 on Bottom Layer "Bottom Layer-SPI-F_WP_NANO" (solid, pour order 67): 52.074,31.62 52.074,33 50.66,33 50.66,31.62
UART3-RXD on Bottom Layer "Bottom Layer-UART0-RXD_NANO_IN" (solid, pour order 68): 59.694,31.62 59.694,33 58.28,33 58.28,31.62
GPIO11/UART3-DTR on Bottom Layer "Bottom Layer-SPI-F_CS0_NANO" (solid, pour order 69): 41.914,31.62 41.914,33 40.5,33 40.5,31.62
GPIO56/D3 on Bottom Layer "Bottom Layer-GPIO21_NANO" (solid, pour order 70): 49.534,31.62 49.534,33 48.12,33 48.12,31.62
GPIO12/UART3-DSR on Bottom Layer "Bottom Layer-UART0-DSR_NANO" (solid, pour order 73): 39.374,31.62 39.374,33 37.96,33 37.96,31.62
GPIO57/D4 on Bottom Layer "Bottom Layer-SPI-F_HD_NANO" (solid, pour order 74): 46.994,31.62 46.994,33 45.58,33 45.58,31.62
SPI-CLK on Bottom Layer "Bottom Layer-SPI-F_CLK_NANO" (solid, pour order 33): 25.26,16.38 25.26,15 26.674,15 26.674,16.38
UART3-CTS on Bottom Layer "Bottom Layer-UART0-CTS_NANO" (solid, pour order 66): 34.294,31.62 34.294,33 32.88,33 32.88,31.62
SPI-CS on Bottom Layer "Bottom Layer-UART0-RTS_NANO" (solid, pour order 72): 31.754,31.62 31.754,33 30.34,33 30.34,31.62
UART3-RTS on Bottom Layer "Bottom Layer-UART0-DTR_NANO" (solid, pour order 63): 36.834,31.62 36.834,33 35.42,33 35.42,31.62
SPI-MOSI on Bottom Layer "Bottom Layer-SPI-F_D_NANO" (solid, pour order 76): 29.214,31.62 29.214,33 27.8,33 27.8,31.62
GND on Bottom Layer "Bottom Layer-GND" (solid, pour order 75): 54.614,31.62 54.614,33 53.2,33 53.2,31.62
RESET on Bottom Layer "Bottom Layer-RESET_N" (solid, pour order 71): 57.154,31.62 57.154,33 55.74,33 55.74,31.62
SPI-MISO on Bottom Layer "Bottom Layer-SPI-F_Q_NANO" (solid, pour order 65): 26.674,31.62 26.674,33 25.26,33 25.26,31.62
VIN on Bottom Layer "Bottom Layer-VIN" (solid, pour order 45): 60.82,16.38 60.82,15 62.234,15 62.234,16.38
IOREF on Bottom Layer "Bottom Layer-IOREF" (solid, pour order 43): 30.34,16.38 30.34,15 31.754,15 31.754,16.38
GND on Bottom Layer "Bottom Layer-GND 1" (solid, pour order 41): 58.28,16.38 58.28,15 59.694,15 59.694,16.38
RESET on Bottom Layer "Bottom Layer-RESET_N 1" (solid, pour order 38): 55.74,16.38 55.74,15 57.154,15 57.154,16.38
+3V3 on Bottom Layer "Bottom Layer-3V3" (solid, pour order 37): 27.8,16.38 27.8,15 29.214,15 29.214,16.38
VBUS_OUT on Bottom Layer "Bottom Layer-VBUS" (solid, pour order 32): 53.2,16.38 53.2,15 54.614,15 54.614,16.38
no net on Bottom Solder "NONET_L-01_P-001" (solid): 8.758,30.006 0.381,30.006 0.381,18.006 7.542,18.006 8.758,18.006
no net on Bottom Solder (solid): 35.42,16.38 35.42,15 36.834,15 36.834,16.38
no net on Bottom Solder (solid): 26.674,31.62 26.674,33 25.26,33 25.26,31.62
no net on Bottom Solder (solid): 29.214,31.62 29.214,33 27.8,33 27.8,31.62
no net on Bottom Solder (solid): 31.754,31.62 31.754,33 30.34,33 30.34,31.62
no net on Bottom Solder (solid): 34.294,31.62 34.294,33 32.88,33 32.88,31.62
no net on Bottom Solder (solid): 36.834,31.62 36.834,33 35.42,33 35.42,31.62
no net on Bottom Solder (solid): 39.374,31.62 39.374,33 37.96,33 37.96,31.62
no net on Bottom Solder (solid): 41.914,31.62 41.914,33 40.5,33 40.5,31.62
no net on Bottom Solder (solid): 44.454,31.62 44.454,33 43.04,33 43.04,31.62
no net on Bottom Solder (solid): 46.994,31.62 46.994,33 45.58,33 45.58,31.62
no net on Bottom Solder (solid): 49.534,31.62 49.534,33 48.12,33 48.12,31.62
no net on Bottom Solder (solid): 52.074,31.62 52.074,33 50.66,33 50.66,31.62
GND on Bottom Solder (solid): 54.614,31.62 54.614,33 53.2,33 53.2,31.62
RESET on Bottom Solder (solid): 57.154,31.62 57.154,33 55.74,33 55.74,31.62
no net on Bottom Solder (solid): 59.694,31.62 59.694,33 58.28,33 58.28,31.62
no net on Bottom Solder (solid): 62.234,31.62 62.234,33 60.82,33 60.82,31.62
VIN on Bottom Solder (solid): 60.82,16.38 60.82,15 62.234,15 62.234,16.38
GND on Bottom Solder (solid): 58.28,16.38 58.28,15 59.694,15 59.694,16.38
RESET on Bottom Solder (solid): 55.74,16.38 55.74,15 57.154,15 57.154,16.38
VBUS on Bottom Solder (solid): 53.2,16.38 53.2,15 54.614,15 54.614,16.38
no net on Bottom Solder (solid): 50.66,16.38 50.66,15 52.074,15 52.074,16.38
no net on Bottom Solder (solid): 48.12,16.38 48.12,15 49.534,15 49.534,16.38
no net on Bottom Solder (solid): 45.58,16.38 45.58,15 46.994,15 46.994,16.38
no net on Bottom Solder (solid): 43.04,16.38 43.04,15 44.454,15 44.454,16.38
GPIO45 on Bottom Solder (solid): 40.5,16.38 40.5,15 41.914,15 41.914,16.38
no net on Bottom Solder (solid): 37.96,16.38 37.96,15 39.374,15 39.374,16.38
no net on Bottom Solder (solid): 32.88,16.38 32.88,15 34.294,15 34.294,16.38
IOREF on Bottom Solder (solid): 30.341,16.38 30.341,15 31.755,15 31.755,16.38
+3V3 on Bottom Solder (solid): 27.8,16.38 27.8,15 29.214,15 29.214,16.38
+3V3 on Bottom Solder (solid): 25.26,16.38 25.26,15 26.674,15 26.674,16.38
no net on Top Solder "NONET_L-01_P-001" (solid): 0.406,30.009 8.788,30.009 8.788,18.009 0.406,18.009
GND on Top Solder (solid): 54.614,31.62 54.614,33 53.2,33 53.2,31.62
no net on Top Solder (solid): 49.534,31.62 49.534,33 48.12,33 48.12,31.62
no net on Top Solder (solid): 46.994,31.62 46.994,33 45.58,33 45.58,31.62
no net on Top Solder (solid): 44.454,31.62 44.454,33 43.04,33 43.04,31.62
no net on Top Solder (solid): 41.914,31.62 41.914,33 40.5,33 40.5,31.62
no net on Top Solder (solid): 36.834,31.62 36.834,33 35.42,33 35.42,31.62
no net on Top Solder (solid): 39.374,31.62 39.374,33 37.96,33 37.96,31.62
no net on Top Solder (solid): 34.294,31.62 34.294,33 32.88,33 32.88,31.62
no net on Top Solder (solid): 26.674,31.62 26.674,33 25.26,33 25.26,31.62
no net on Top Solder (solid): 31.754,31.62 31.754,33 30.34,33 30.34,31.62
no net on Top Solder (solid): 29.214,31.62 29.214,33 27.8,33 27.8,31.62
no net on Top Solder (solid): 62.234,31.62 62.234,33 60.82,33 60.82,31.62
no net on Top Solder (solid): 59.694,31.62 59.694,33 58.28,33 58.28,31.62
RESET on Top Solder (solid): 57.154,31.62 57.154,33 55.74,33 55.74,31.62
no net on Top Solder (solid): 52.074,31.62 52.074,33 50.66,33 50.66,31.62
+3V3 on Top Solder (solid): 27.8,16.38 27.8,15 29.214,15 29.214,16.38
no net on Top Solder (solid): 35.42,16.38 35.42,15 36.834,15 36.834,16.38
no net on Top Solder (solid): 37.96,16.38 37.96,15 39.374,15 39.374,16.38
no net on Top Solder (solid): 43.04,16.38 43.04,15 44.454,15 44.454,16.38
no net on Top Solder (solid): 45.58,16.38 45.58,15 46.994,15 46.994,16.38
no net on Top Solder (solid): 48.12,16.38 48.12,15 49.534,15 49.534,16.38
no net on Top Solder (solid): 50.66,16.38 50.66,15 52.074,15 52.074,16.38
GPIO45 on Top Solder (solid): 40.5,16.38 40.5,15 41.914,15 41.914,16.38
VBUS on Top Solder (solid): 53.2,16.38 53.2,15 54.614,15 54.614,16.38
GND on Top Solder (solid): 58.28,16.38 58.28,15 59.694,15 59.694,16.38
VIN on Top Solder (solid): 60.82,16.38 60.82,15 62.234,15 62.234,16.38
RESET on Top Solder (solid): 55.74,16.38 55.74,15 57.154,15 57.154,16.38
no net on Top Solder (solid): 32.88,16.38 32.88,15 34.294,15 34.294,16.38
no net on Top Solder (solid): 25.26,16.38 25.26,15 26.674,15 26.674,16.38
IOREF on Top Solder (solid): 30.341,16.38 30.341,15 31.755,15 31.755,16.38
GND on Layer 3 "GND_L3" (solid, remove dead copper, pour order 127): 22.035,29.9 0,29.9 0,17.9 22,17.9 22,17.707 22,15.175 22.175,15 87.909,15 87.909,33 22.035,33
+3V3 on Layer 3 "LAYER_3_+3V3_P114" (solid, pour order 114): 27.575,18.125 28.975,19.525 28.95,21.025 29.55,21.625 31.1,21.625 31.825,20.9 34.95,20.9 35.85,21.8 50.731,21.8 51.231,22.3 58.025,22.3 58.025,24.453 58.489,24.917 59.783,24.917 63.167,24.917 63.167,26.792 63.475,27.1 66.65,27.1 67.25,26.5 67.25,23.95 64.4,21.1 60.1,21.1 58.4,19.4 55.9,19.4 54.2,21.1 53.5,21.1 51.925,19.525 36.125,19.525 34.2,17.6 30.7,17.6 29.5,16.4 29.5,15.6 29.3,15.4 27.9,15.4 27.575,15.725
GND on Layer 2 "GND_L2" (solid, remove dead copper, pour order 126): 22,30 0,30 0,18 22,18 22,15 22.095,15.095 87.909,15.095 87.909,33 22,33

## Other copper
Top Layer:
  pour cut-out: 63,32.7 63.05,32.65 63.05,31.7 64.6,31.7 64.95,32.05 64.95,32.75 64.85,32.85 63.1,32.85
  pour cut-out: 64.2,17.43 63.63,17.43 63.05,16.85 63.05,15.4 63.25,15.2 64.75,15.2 65.35,15.8 65.35,17.3 65.2,17.45
  pour cut-out: 24.5,15.25 24.5,17.2 24.5,17.35 23.975,17.35 22.25,17.35 22.25,15.25
  pour cut-out: 24.5,32.75 24.5,30.6 22.25,30.6 22.25,32.75
  text "1" at 22.446,27.744 h0.6
Layer 3:
  text "3" at 22.346,27.744 h0.6
Layer 2:
  text "2" at 22.325,27.775 h0.6
Bottom Layer:
  text "4" at 22.346,27.744 h0.6

## Silkscreen, mask and mechanical layers (free items; w line width, h text height)
Top Overlay:
  text "SW4" at 39.8,28.925 h0.8
  text "u" at 47.04,26.293 h3.6
  text "USB-IRIS-W1 vC" at 47.267,24.763 h0.8
  text "www.u-blox.com" at 47.803,23.464 h0.75
  text "SW1" at 52.95,20.75 h0.8
  text "SW2" at 59.95,20.75 h0.8
  text "RESET" at 46.975,20.65 h0.8
Bottom Overlay:
  circle w0.25: c45.825,27.475 r0.1
  text "3" at 67.15,31.15 h0.8 r270
  text "1" at 62.35,30.45 h0.8 r270
  text "15" at 24.35,29.85 h0.8 r270
  text "RXD" at 58.75,28.45 h0.8 r270
  text "RTS" at 35.75,28.35 h0.8 r270
  text "GND" at 53.55,28.35 h0.8 r270
  text "RST" at 55.85,28.35 h0.8 r270
  text "TXD" at 61.05,28.35 h0.8 r270
  text "CTS" at 33.15,28.25 h0.8 r270
  text "MOSI" at 28.05,27.75 h0.8 r270
  text "MISO" at 25.55,27.65 h0.8 r270
  text "16" at 29.55,27.35 h0.8 r270
  text "11" at 63.75,27.15 h0.8 r270
  text "GPIO56" at 48.55,26.95 h0.66 r270
  text "GPIO62" at 51.15,26.95 h0.66 r270
  text "GPIO57" at 46.53,26.871 h0.68 r270
  text "2" at 57.05,26.65 h0.8 r270
  text "GPIO58" at 42.695,26.185 h0.8 r270
  text "SPI-CS" at 30.85,26.05 h0.8 r270
  text "GPIO11/DTR" at 40.95,25.15 h0.6 r270
  text "GPIO12/DSR" at 38.35,25.05 h0.6 r270
  text "7" at 56.15,24.25 h0.8 r270
  text "12" at 62.45,23.35 h0.8 r270
  text "SW4" at 43.3,23.05 h0.8
  text "15" at 29.55,22.25 h0.8 r270
  text "9" at 61.55,22.15 h0.8 r270
  text "GND" at 27.45,22.05 h0.8 r270
  text "4" at 57.65,21.15 h0.8 r270
  text "8" at 55.801,21.13 h0.8 r270
  text "5" at 63.15,20.75 h0.8 r270
  text "10" at 59.55,20.55 h0.8 r270
  text "6" at 56.45,19.65 h0.8 r270
  text "UBXH60-0001032" at 22.98,18.93 h0.8 r270
  text "13" at 65.15,18.25 h0.8 r270
  text "1" at 68.15,17.75 h0.8 r270
  text "GPIO45" at 33.15,17.45 h0.8 r270
  text "GPIO46" at 35.75,17.45 h0.8 r270
  text "GPIO47" at 38.25,17.45 h0.8 r270
  text "GPIO48" at 40.75,17.45 h0.8 r270
  text "SDA" at 43.35,17.45 h0.8 r270
  text "SCL" at 45.85,17.45 h0.8 r270
  text "VIN" at 61.05,17.45 h0.8 r270
  text "CLK" at 25.347,17.422 h0.8 r270
  text "5V" at 53.058,17.422 h0.8 r270
  text "3V3" at 28.15,17.4 h0.8 r270
  text "GPIO49" at 48.4,17.4 h0.72 r270
  text "GPIO61" at 50.9,17.4 h0.73 r270
  text "RST" at 54.65,17.4 h0.8 r270
  text "IOREF" at 30.45,17.35 h0.8 r270
  text "16" at 24.258,17.119 h0.8 r270
  text "GND" at 57.59,17.01 h0.8 r270
  text "30" at 62.296,16.873 h0.8 r270
Drill Guide:
  drawing of 347 lines, arcs and shapes, not listed
  text "Layer" at 24.817,127.179 h1.52
  text "Name" at 35.229,127.179 h1.52
  text "Material" at 69.001,127.179 h1.52
  text "Thickness" at 90.839,127.179 h1.52
  text "Constant" at 107.345,127.179 h1.52
  text "Board Layer Stack" at 121.82,127.179 h1.52
  text "Top Overlay" at 35.229,124.131 h1.52
  text "Top Solder" at 35.229,121.083 h1.52
  text "Solder Resist" at 69.001,121.083 h1.52
  text "0.40mil" at 90.839,121.083 h1.52
  text "3.5" at 107.345,121.083 h1.52
  text "Top Surface Finish" at 35.229,118.035 h1.52
  text "Nickel, Gold" at 69.001,118.035 h1.52
  text "0.16mil" at 90.839,118.035 h1.52
  text "1" at 24.817,114.987 h1.52
  text "Top Layer" at 35.229,114.987 h1.52
  text "CF-003" at 69.001,114.987 h1.52
  text "1.38mil" at 90.839,114.987 h1.52
  text "Dielectric 2" at 35.229,111.939 h1.52
  text "Prepreg 1080" at 69.001,111.939 h1.52
  text "7.09mil" at 90.839,111.939 h1.52
  text "3.77" at 107.345,111.939 h1.52
  text "2" at 24.817,108.891 h1.52
  text "Layer 2" at 35.229,108.891 h1.52
  text "CF-003" at 69.001,108.891 h1.52
  text "0.71mil" at 90.839,108.891 h1.52
  text "Dielectric10" at 35.229,105.843 h1.52
  text "Core-039" at 69.001,105.843 h1.52
  text "78.96mil" at 90.839,105.843 h1.52
  text "4.8" at 107.345,105.843 h1.52
  text "3" at 24.817,102.795 h1.52
  text "Layer 3" at 35.229,102.795 h1.52
  text "CF-003" at 69.001,102.795 h1.52
  text "0.71mil" at 90.839,102.795 h1.52
  text "Dielectric 7" at 35.229,99.747 h1.52
  text "Prepreg 1080" at 69.001,99.747 h1.52
  text "7.09mil" at 90.839,99.747 h1.52
  text "3.77" at 107.345,99.747 h1.52
  text "4" at 24.817,96.699 h1.52
  text "Bottom Layer" at 35.229,96.699 h1.52
  text "CF-003" at 69.001,96.699 h1.52
  text "1.38mil" at 90.839,96.699 h1.52
  text "Bottom Surface Finish" at 35.229,93.651 h1.52
  text "Nickel, Gold" at 69.001,93.651 h1.52
  text "0.16mil" at 90.839,93.651 h1.52
  text "Bottom Solder" at 35.229,90.603 h1.52
  text "Solder Resist" at 69.001,90.603 h1.52
  text "0.40mil" at 90.839,90.603 h1.52
  text "3.5" at 107.345,90.603 h1.52
  text "Bottom Overlay" at 35.229,87.555 h1.52
Mechanical 1:
  the board outline again, w0.5
PIN_NUM:
  text "J5-15" at 22.759,31.454 h1
  text "J5-1" at 63.018,31.353 h1
  text "R7" at 60.25,26.518 h1
  text "R4" at 61.901,25.603 h1
  text "F1" at 14.001,21.9 h1
  text "U1" at 30.175,21.32 h1
  text "R1" at 22.328,19.05 h1
  text "SW1" at 48.489,18.45 h1
  text "D1" at 24.055,17.145 h1
  text "J5-16" at 22.546,16.212 h1
  text "J5-30" at 62.637,16.062 h1
Mechanical 13:
  circle w0.05: c43.256,29.159 r0.402
  circle w0.05: c29.362,25.578 r0.402
  lines w0.05: 23.68,20.65 23.68,21.555 ; 24.1,17.9 24.1,18.648 ; 25.8,22.5 27.6,22.5 ; 34.214,18.887 34.214,20.687
Drill Drawing:
  circle w0.254: c25.652,69.691 r0.847
  lines w0.254: 24.805,57.414 25.652,57.837 26.499,57.414 26.075,58.261 26.499,59.107 25.652,58.684 24.805,59.107 25.229,58.261 24.805,57.414 ; 24.805,61.647 25.229,61.647 25.652,61.224 26.075,61.647 26.499,61.647 26.075,62.071 26.499,62.494 26.075,62.494 25.652,62.917 25.229,62.494 24.805,62.494 25.229,62.071 24.805,61.647 ; 24.805,65.034 26.499,65.034 26.499,66.727 24.805,66.727 24.805,65.034 ; 24.805,74.347 26.499,74.347 25.652,72.654 24.805,74.347
  lines w0.381: 23.287,56.271 292.706,56.271 ; 23.287,75.321 292.706,75.321 ; 37.279,52.461 37.279,79.131 ; 52.515,52.461 52.515,79.131 ; 80.193,52.461 80.193,79.131 ; 93.042,52.461 93.042,79.131 ; 111.681,52.461 111.681,79.131 ; 149.769,52.461 149.769,79.131 ; 164.751,52.461 164.751,79.131 ; 183.695,52.461 183.695,79.131 ; 201.724,52.461 201.724,79.131 ; 223.816,52.461 223.816,79.131 ; 257.689,52.461 257.689,79.131 ; 23.287,52.461 292.706,52.461 292.706,79.131 23.287,79.131 23.287,52.461
  text "Symbol" at 25.573,76.464 h1.83
  text "Count" at 38.422,76.464 h1.83
  text "Hole Size" at 53.658,76.464 h1.83
  text "Plated" at 81.336,76.464 h1.83
  text "Hole Type" at 94.185,76.464 h1.83
  text "Drill Layer Pair" at 112.824,76.464 h1.83
  text "Via/Pad" at 150.912,76.464 h1.83
  text "Pad Shape" at 165.894,76.464 h1.83
  text "Template" at 184.838,76.464 h1.83
  text "Description" at 202.867,76.464 h1.83
  text "Hole Tolerance (+)" at 224.959,76.464 h1.83
  text "Hole Tolerance (-)" at 258.832,76.464 h1.83
  text "3" at 38.422,72.654 h1.52
  text "1.000mm (39.37mil)" at 53.658,72.654 h1.52
  text "PTH" at 81.336,72.654 h1.52
  text "Round" at 94.185,72.654 h1.52
  text "Top Layer - Bottom Layer" at 112.824,72.654 h1.52
  text "Pad" at 150.912,72.654 h1.52
  text "Rounded" at 165.894,72.654 h1.52
  text "c100h100p-1" at 184.838,72.654 h1.52
  text "4" at 38.422,68.844 h1.52
  text "1.800mm (70.87mil)" at 53.658,68.844 h1.52
  text "NPTH" at 81.336,68.844 h1.52
  text "Round" at 94.185,68.844 h1.52
  text "Top Layer - Bottom Layer" at 112.824,68.844 h1.52
  text "Pad" at 150.912,68.844 h1.52
  text "Rounded" at 165.894,68.844 h1.52
  text "c180hn180" at 184.838,68.844 h1.52
  text "30" at 38.422,65.034 h1.52
  text "0.914mm (35.98mil)" at 53.658,65.034 h1.52
  text "PTH" at 81.336,65.034 h1.52
  text "Round" at 94.185,65.034 h1.52
  text "Top Layer - Bottom Layer" at 112.824,65.034 h1.52
  text "Pad" at 150.912,65.034 h1.52
  text "(Mixed)" at 165.894,65.034 h1.52
  text "(Mixed)" at 184.838,65.034 h1.52
  text "166" at 38.422,61.224 h1.52
  text "0.300mm (11.81mil)" at 53.658,61.224 h1.52
  text "PTH" at 81.336,61.224 h1.52
  text "Round" at 94.185,61.224 h1.52
  text "Top Layer - Bottom Layer" at 112.824,61.224 h1.52
  text "Via" at 150.912,61.224 h1.52
  text "Rounded" at 165.894,61.224 h1.52
  text "v550h0300" at 184.838,61.224 h1.52
  text "TH_300_550_um" at 202.867,61.224 h1.52
  text "0.100mm (3.94mil)" at 224.959,61.224 h1.52
  text "0.100mm (3.94mil)" at 258.832,61.224 h1.52
  text "234" at 38.422,57.414 h1.52
  text "0.300mm (11.81mil)" at 53.658,57.414 h1.52
  text "PTH" at 81.336,57.414 h1.52
  text "Round" at 94.185,57.414 h1.52
  text "Top Layer - Bottom Layer" at 112.824,57.414 h1.52
  text "Via" at 150.912,57.414 h1.52
  text "Rounded" at 165.894,57.414 h1.52
  text "v50h30" at 184.838,57.414 h1.52
  text "437 Total" at 38.422,53.604 h1.52
Outline:
  lines w0.2: 22,15.011 22,18 22,30 22,33 87.909,33 87.909,15.011 22,15.011

## Text inside footprints (layer, text, board x,y; h text height)
J2: Assembly Notes "Card edge" at -0.655,20.844 h1.57 r90